# EAGLE board boost (EAGLE 7.6.0)
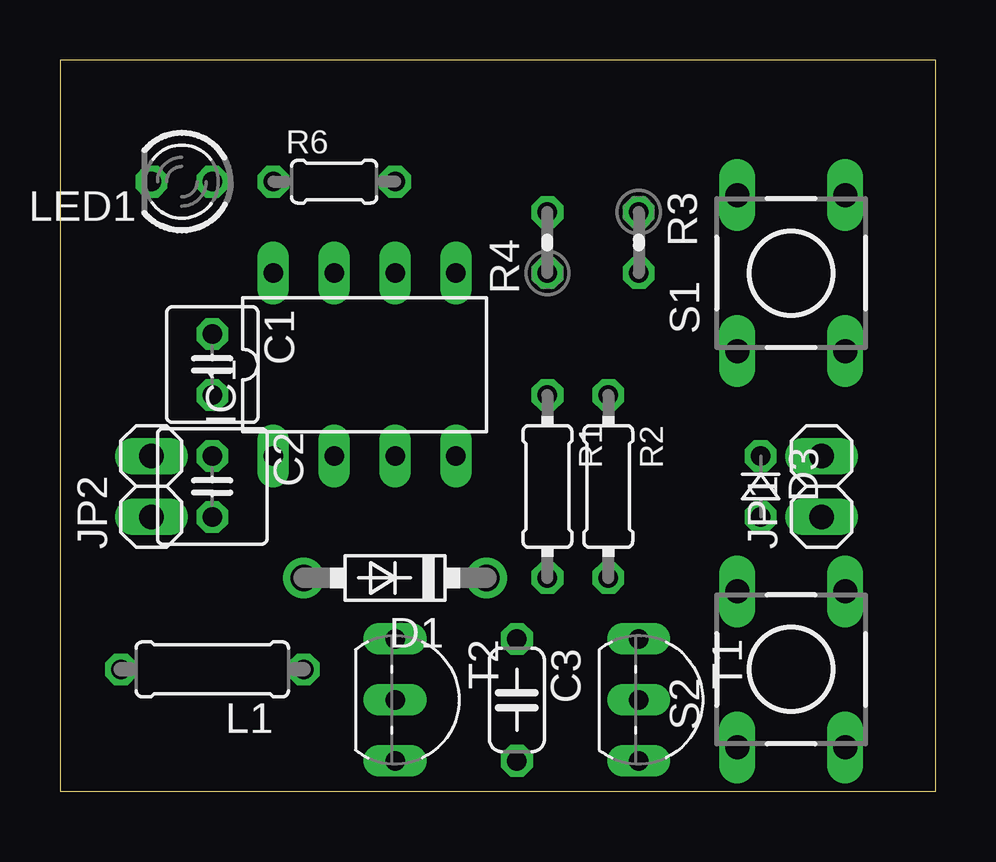
[diagram p0: board, top side]
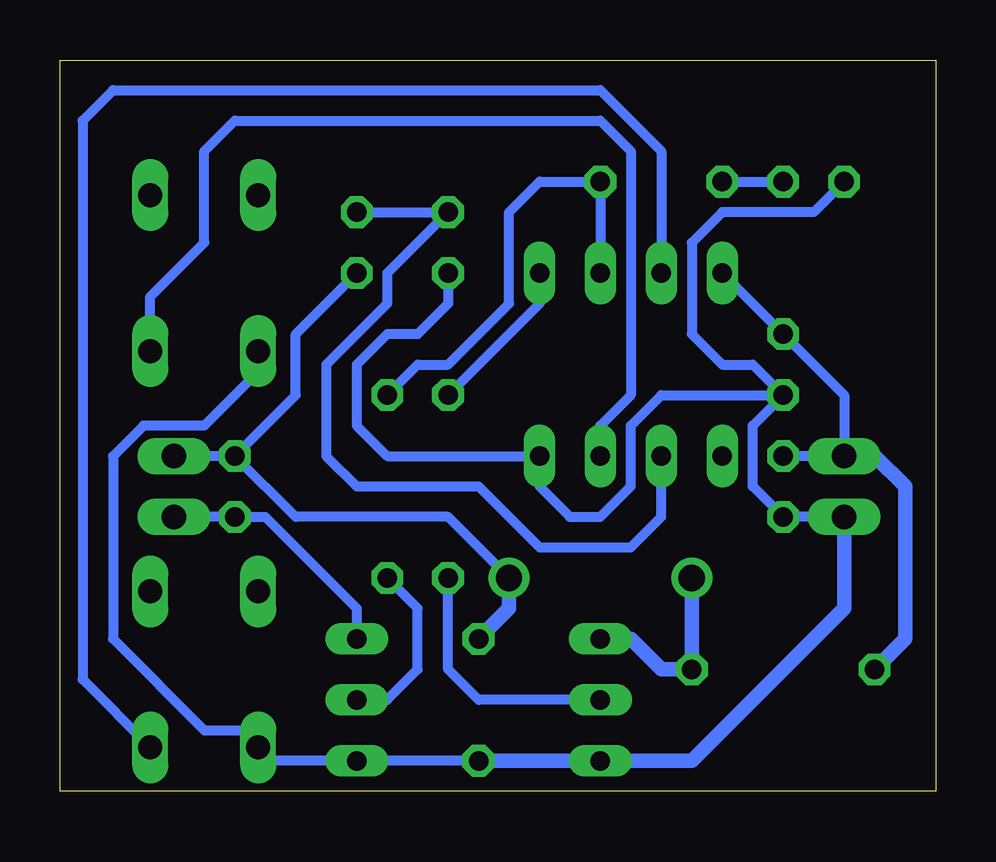
[diagram p1: board, bottom side, seen from below]

Size 36.5 x 30.47 mm. Coordinates in mm from the lower left corner, seen from the top.
Outline: 0,0 36.5,0 36.5,30.47 0,30.47 0,0
Copper layers (1*16): Top 0.035mm / dielectric 1.5mm / Bottom 0.035mm
Design rules "default": minimum track width 10mil, minimum drill 24mil, track to track 8mil, track to pad 8mil, pad to pad 8mil, via to via 8mil, smd to smd 8mil, copper to edge 40mil, drill to drill 8mil, minimum pad ring 10mil, minimum via ring 8mil, stop-mask expansion 4mil, vias tented up to drill 0mil, thermal gap 10mil

## Footprints (pad centres in the part's own frame; a part is rotated, then mirrored left to right if it is on the bottom)
C025-040X050 = drill 0.813 octagon: 1 -1.27,0; 2 1.27,0
C025-050X050 = drill 0.813 octagon: 1 -1.27,0; 2 1.27,0
C050-024X044 = drill 0.813 octagon: 1 -2.54,0; 2 2.54,0
DO41-7.6 = drill 1.1 pad 1.7: A 3.81,0; C -3.81,0
D-2.5 = drill 0.813 octagon: A 1.27,0; C -1.27,0
DIL08 = drill 0.813 long: 1 -3.81,-3.81; 2 -1.27,-3.81; 3 1.27,-3.81; 4 3.81,-3.81; 5 3.81,3.81; 6 1.27,3.81; 7 -1.27,3.81; 8 -3.81,3.81
1X02 = drill 1.016 long: 1 -1.27,0; 2 1.27,0
0207/7 = drill 0.813 octagon: 1 -3.81,0; 2 3.81,0
LED3MM = drill 0.813 octagon: A -1.27,0; K 1.27,0
0204/7 = drill 0.813 octagon: 1 -3.81,0; 2 3.81,0
0204V = drill 0.813 octagon: 1 -1.27,0; 2 1.27,0
0204/5 = drill 0.813 octagon: 1 -2.54,0; 2 2.54,0
DTS-6 = drill 1 long: 1 -3.25,2.25; 2 3.25,2.25; 3 -3.25,-2.25; 4 3.25,-2.25
TO92-CBE = drill 0.813 long: B 0,0; C -2.54,0; E 2.54,0

## Placement (x,y rotation side)
C1  [C025-040X050]  6.35,17.78 270 top
C2  [C025-050X050]  6.35,12.7 270 top
C3  [C050-024X044]  19.05,3.81 270 top
D1  1N5819-B  [DO41-7.6]  13.97,8.89 180 top
D3  [D-2.5]  29.21,12.7 270 top
IC1  TINY13V-10PU  [DIL08]  12.7,17.78 0 top
JP1  [1X02]  31.75,12.7 90 top
JP2  [1X02]  3.81,12.7 90 top
L1  [0207/7]  6.35,5.08 180 top
LED1  [LED3MM]  5.08,25.4 180 top
R1  [0204/7]  20.32,12.7 270 top
R2  [0204/7]  22.86,12.7 270 top
R3  [0204V]  24.13,22.86 270 top
R4  [0204V]  20.32,22.86 90 top
R6  [0204/5]  11.43,25.4 0 top
S1  DTS-6  [DTS-6]  30.48,21.59 90 top
S2  DTS-6  [DTS-6]  30.48,5.08 90 top
T1  [TO92-CBE]  24.13,3.81 270 top
T2  [TO92-CBE]  13.97,3.81 270 top

## Library data of the parts
C1-C3 L1 R1-R4 R6 = rcl
D1 D3 = diode
IC1 = atmel; MPN: ATTINY13V-10PU; OC_FARNELL: 9171576; OC_NEWARK: 96K6523
JP1 JP2 = pinhead
LED1 = led
S1 S2 = switch-tact
T1 T2 = transistor

## Nets
+5V: C1.1 C2.1 IC1.8 JP2.2 L1.2
GND: C1.2 C2.2 C3.2 IC1.4 JP2.1 LED1.K R4.1 S1.1 S2.1 T1.E T2.E
N$1: R1.2 T2.B
N$2: IC1.5 R1.1
N$3: D1.A L1.1 T2.C
N$4: IC1.2 R3.1 R4.2
N$5: IC1.3 S1.3
N$6: R2.2 T1.B
N$7: IC1.6 R2.1 R6.2
N$8: D3.A JP1.1 T1.C
N$9: C3.1 D1.C D3.C JP1.2 R3.2
N$11: LED1.A R6.1
N$15: IC1.7 S2.3

## Tracks (layer width: path | path; a pad name or v marks a point on that pad's centre or on a via)
+5V
  Bottom 0.406: C2.1 JP2.2 3.81,16.51 C1.1 IC1.8
  Bottom 0.61: JP2.2 2.54,13.97 1.27,12.7 1.27,6.35 L1.2
GND
  Bottom 0.406: C3.2 T1.E 27.67,1.27 S2.1 28.94,2.54 30.48,2.54 34.29,6.35 34.29,13.97 33.02,15.24 30.48,15.24 28.23,17.49 S1.1 | R4.1 20.32,20.32 21.59,19.05 22.86,19.05 24.13,17.78 24.13,15.24 22.86,13.97 IC1.4 16.51,12.7 15.24,11.43 13.97,11.43 12.7,12.7 12.7,15.24 11.43,16.51 C1.2 | JP2.1 C2.2 7.62,12.7 7.62,15.24 C1.2 | LED1.K 5.08,24.13 8.89,24.13 10.16,22.86 10.16,19.05 8.89,17.78 7.62,17.78 C1.2
  Bottom 0.61: JP2.1 3.81,7.62 10.16,1.27 T2.E C3.2
N$1
  Bottom 0.406: T2.B 19.05,3.81 20.32,5.08 R1.2
N$2
  Bottom 0.406: R1.1 16.51,20.32 IC1.5
N$3
  Bottom 0.61: D1.A L1.1 11.43,5.08 12.7,6.35 T2.C
N$4
  Bottom 0.406: R3.1 R4.2 22.86,21.59 22.86,20.32 25.4,17.78 25.4,13.97 24.13,12.7 19.05,12.7 16.51,10.16 12.7,10.16 11.43,11.43 IC1.2
N$5
  Bottom 0.406: S1.3 32.73,20.61 30.48,22.86 30.48,26.67 29.21,27.94 13.97,27.94 12.7,26.67 12.7,16.51 13.97,15.24 IC1.3
N$6
  Bottom 0.406: T1.B 22.86,3.81 21.59,5.08 21.59,7.62 R2.2
N$7
  Bottom 0.406: R2.1 21.59,17.78 20.32,17.78 17.78,20.32 17.78,24.13 16.51,25.4 R6.2 IC1.6
N$8
  Bottom 0.406: JP1.1 D3.A 27.94,11.43 24.13,7.62 T1.C
N$9
  Bottom 0.406: D3.C JP1.2 | D1.C 20.32,11.43 26.67,11.43 D3.C | D3.C 26.67,16.51 26.67,19.05 R3.2
  Bottom 0.61: D1.C 17.78,7.62 C3.1
N$11
  Bottom 0.406: R6.1 LED1.A
N$15
  Bottom 0.406: IC1.7 11.43,26.67 13.97,29.21 34.29,29.21 35.56,27.94 35.56,4.66 S2.3